# Altium PCB Holder_Accu_Simetric.PcbDoc
Units mm, origin at the board's own origin, x right, y up, seen from the top; angles counter-clockwise.
Board outline 356.65 x 138 mm, 2 copper layers (Top Layer, Bottom Layer); 20 components, 16 nets, 103 pads, 28 vias.
Unrouted connection lines stored in the file: 16.
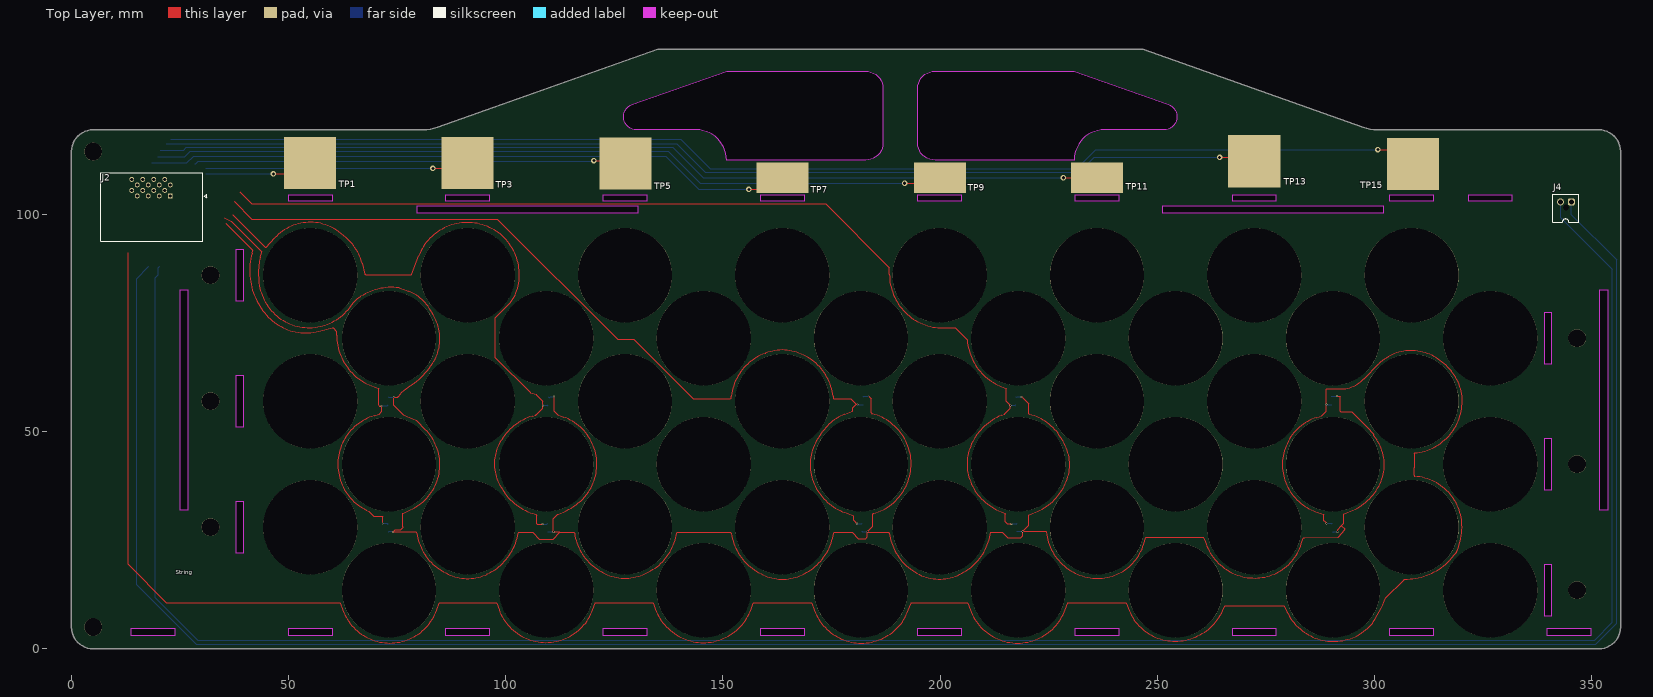
[diagram p0: Top Layer view]
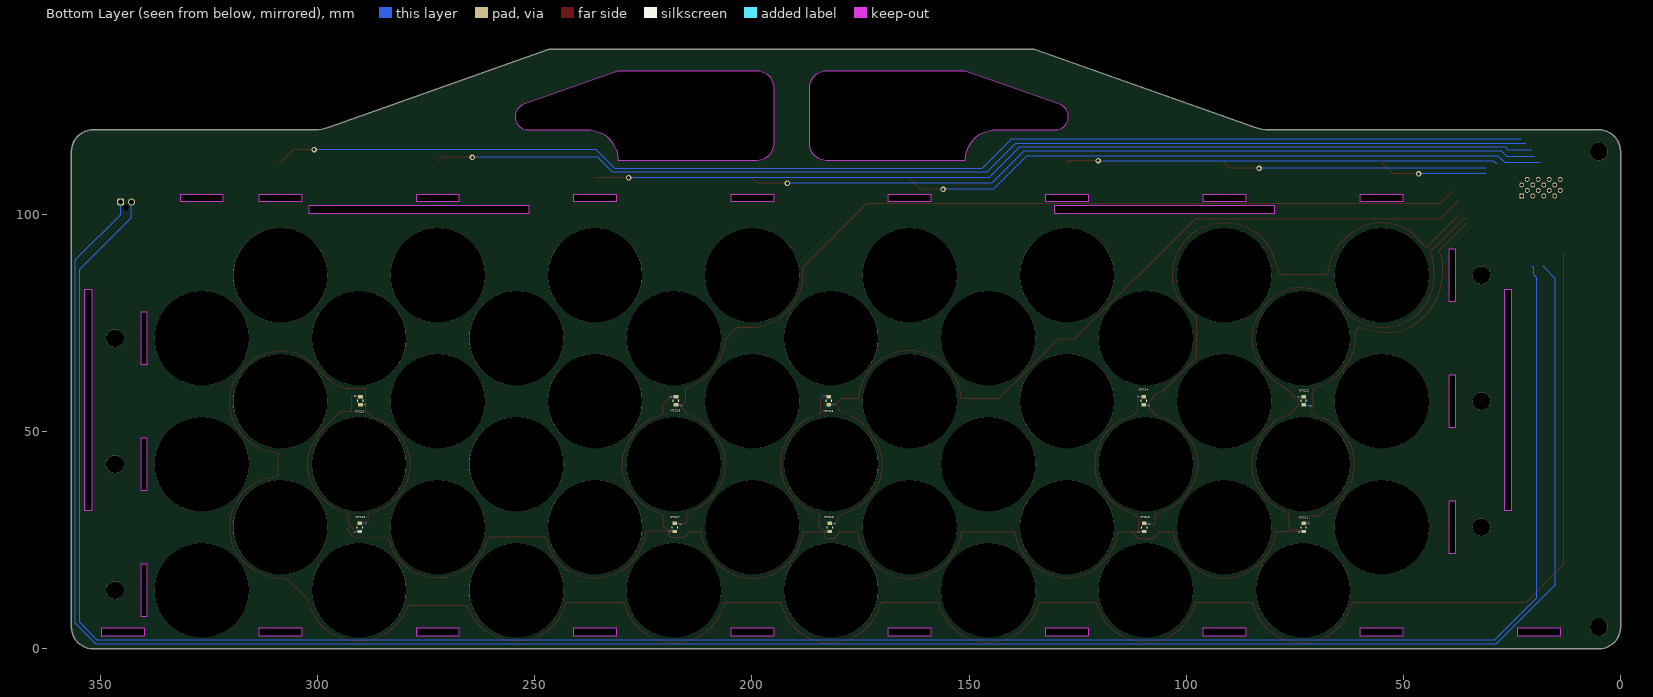
[diagram p1: Bottom Layer view, seen from below]
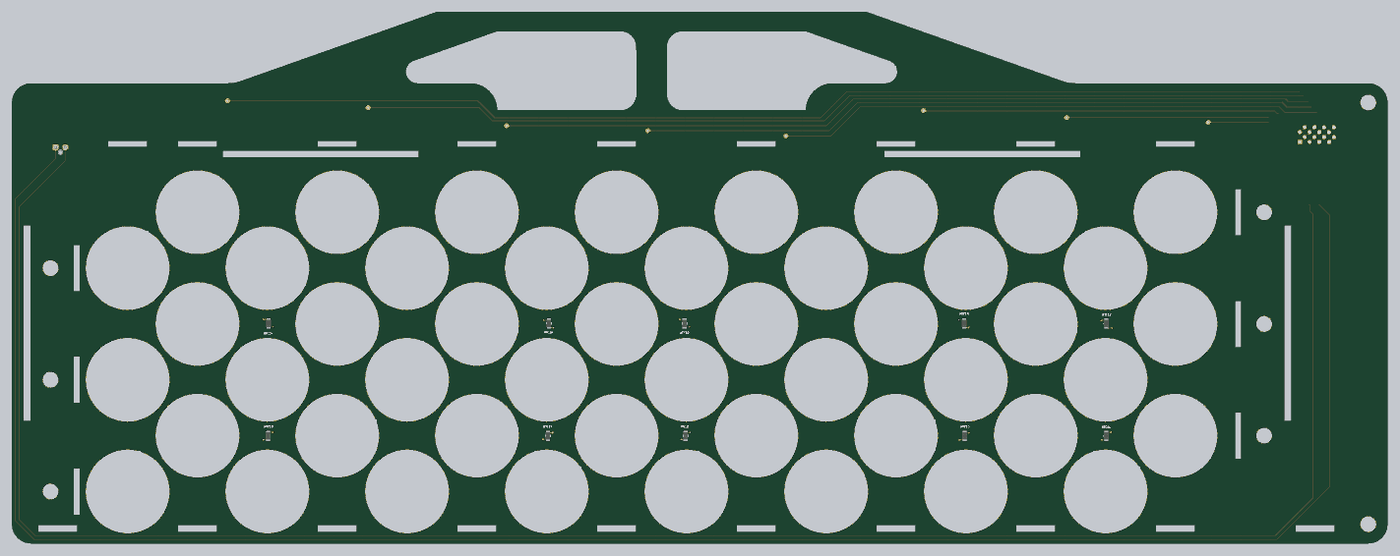
[diagram p2: 3D render of the assembled board from below, using the file's embedded part models]

## Layer stack, top to bottom
Top Solder: solder mask 0.0102, Solder Resist, Dk 3.5
Top Layer: signal copper 0.0356
Dielectric 1: dielectric 0.32, FR-4, Dk 4.8
Bottom Layer: signal copper 0.0356
Bottom Solder: solder mask 0.0102, Solder Resist, Dk 3.5

## Board outline
134.975,138 84.308,120.072 83.495,119.823 82.665,119.644 81.822,119.536 80.972,119.5 4.998,119.5 4.346,119.457 3.704,119.329 3.085,119.119 2.498,118.83 1.954,118.466 1.463,118.035 1.031,117.543 0.668,117 0.379,116.413 0.168,115.794 0.041,115.152 -0.002,114.5 -0.002,5 0.041,4.347 0.168,3.705 0.379,3.086 0.668,2.5 1.031,1.956 1.463,1.464 1.954,1.033 2.498,0.669 3.085,0.38 3.704,0.17 4.346,0.042 4.998,0 351.649,0 352.301,0.042 352.943,0.17 353.562,0.38 354.149,0.669 354.692,1.033 355.184,1.464 355.615,1.956 355.979,2.5 356.268,3.086 356.478,3.705 356.606,4.347 356.649,5 356.649,114.5 356.606,115.152 356.478,115.794 356.268,116.413 355.979,117 355.615,117.543 355.184,118.035 354.692,118.466 354.149,118.83 353.562,119.119 352.943,119.329 352.301,119.457 351.649,119.5 300.674,119.5 299.825,119.536 298.982,119.644 298.151,119.823 297.339,120.072 246.672,138
cut-out: 49.998,4.75 59.998,4.75 59.998,3 49.998,3
cut-out: 303.538,3 303.538,4.75 313.538,4.75 313.538,3
cut-out: 340.649,7.5 339.149,7.5 339.149,19.5 340.649,19.5
cut-out: 39.498,22 37.998,22 37.998,34 39.498,34
cut-out: 340.649,36.5 339.149,36.5 339.149,48.5 340.649,48.5
cut-out: 39.498,51 37.998,51 37.998,63 39.498,63
cut-out: 339.758,4.75 349.758,4.75 349.758,3 339.758,3
cut-out: 267.318,4.75 277.318,4.75 277.318,3 267.318,3
cut-out: 194.878,4.75 204.878,4.75 204.878,3 194.878,3
cut-out: 122.438,4.75 132.438,4.75 132.438,3 122.438,3
cut-out: 24.998,31.875 24.998,82.625 26.748,82.625 26.748,31.875
cut-out: 302.024,102 302.024,100.25 251.274,100.25 251.274,102
cut-out: 79.623,102 130.373,102 130.373,100.25 79.623,100.25
cut-out: 351.899,82.625 353.649,82.625 353.649,31.875 351.899,31.875
cut-out: 49.998,104.5 59.998,104.5 59.998,103 49.998,103
cut-out: 86.218,104.5 96.218,104.5 96.218,103 86.218,103
cut-out: 122.438,104.5 132.438,104.5 132.438,103 122.438,103
cut-out: 158.658,104.5 168.658,104.5 168.658,103 158.658,103
cut-out: 231.098,104.5 241.098,104.5 241.098,103 231.098,103
cut-out: 267.318,104.5 277.318,104.5 277.318,103 267.318,103
cut-out: 303.538,104.5 313.538,104.5 313.538,103 303.538,103
cut-out: 339.149,77.5 340.649,77.5 340.649,65.5 339.149,65.5
cut-out: 37.998,92 39.498,92 39.498,80 37.998,80
cut-out: 241.098,4.75 241.098,3 231.098,3 231.098,4.75
cut-out: 168.658,4.75 168.658,3 158.658,3 158.658,4.75
cut-out: 96.218,4.75 96.218,3 86.218,3 86.218,4.75
cut-out: 23.778,4.75 23.778,3 13.778,3 13.778,4.75
cut-out: 321.649,104.5 331.649,104.5 331.649,103 321.649,103
cut-out: 194.878,104.5 204.878,104.5 204.878,103 194.878,103
cut-out: 186.823,129 186.823,116.5 186.774,115.874 186.628,115.263 186.387,114.684 186.059,114.148 185.652,113.671 185.175,113.263 184.639,112.935 184.059,112.695 183.449,112.549 182.823,112.5 150.823,112.5 150.779,113.283 150.648,114.057 150.431,114.811 150.13,115.537 149.75,116.224 149.296,116.864 148.773,117.449 148.188,117.972 147.548,118.427 146.861,118.806 146.135,119.107 145.381,119.324 144.607,119.455 143.823,119.5 130.142,119.5 129.621,119.545 129.115,119.68 128.642,119.901 128.213,120.201 127.843,120.571 127.543,121 127.322,121.473 127.187,121.979 127.142,122.5 127.188,123.024 127.325,123.533 127.549,124.01 127.853,124.44 128.228,124.81 128.662,125.109 129.141,125.328 150.823,133 182.823,133 183.449,132.95 184.059,132.804 184.639,132.564 185.175,132.236 185.652,131.828 186.059,131.351 186.387,130.815 186.628,130.236 186.774,129.625
cut-out: 230.823,112.5 198.823,112.5 198.198,112.549 197.587,112.695 197.007,112.935 196.472,113.263 195.995,113.671 195.587,114.148 195.259,114.684 195.019,115.263 194.873,115.874 194.823,116.5 194.823,129 194.873,129.625 195.019,130.236 195.259,130.815 195.587,131.351 195.995,131.828 196.472,132.236 197.007,132.564 197.587,132.804 198.198,132.95 198.823,133 230.823,133 252.506,125.328 252.983,125.11 253.415,124.813 253.789,124.445 254.093,124.017 254.318,123.543 254.457,123.037 254.505,122.515 254.462,121.992 254.328,121.485 254.108,121.008 253.809,120.578 253.439,120.206 253.01,119.904 252.534,119.682 252.028,119.545 251.505,119.5 237.823,119.5 237.04,119.455 236.266,119.324 235.511,119.107 234.786,118.806 234.099,118.427 233.459,117.972 232.874,117.449 232.351,116.864 231.896,116.224 231.517,115.537 231.216,114.811 230.999,114.057 230.867,113.283

## Design rules (kind name [scope] priority, off if disabled: settings)
Clearance [All] p1: gap=0.2 ignorepadtopadclearanceinfootprint=FALSE
DiffPairsRouting [All] p1: maxlimit=0.2 minlimit=0.2 mostfreqgap=0.2 toplayer_minwidth=0.2 toplayer_maxwidth=0.2 toplayer_prefwidth=0.2 bottomlayer_minwidth=0.2 bottomlayer_maxwidth=0.2 bottomlayer_prefwidth=0.2 maxuncoupledlength=12.7
PolygonConnect [All] p1: connectstyle=Relief reliefconductorwidth=0.254 reliefentries=4 polygonreliefangle="90 Angle" airgapwidth=0.254
RoutingVias [All] p1: holewidth=0.711 width=1.27 viastyle="Through Hole" minholewidth=0.711 minwidth=1.27 maxholewidth=0.711 maxwidth=1.27
SolderMaskExpansion [All] p1: expansion=0.102 istentingtop=FALSE
SupplyNets "Schematic Supply Nets" [InNet('GND')] p1: voltage=0.000
UnRoutedNet [All] p1: checkbadconnections=TRUE
Width [All] p1: maxlimit=0.2 minlimit=0.2 preferedwidth=0.2
28 further rules are at their usual default settings.

## Components (designator, comment, footprint, x,y, rotation, side; value= is the part's Value field where it differs from the comment)
J2 "459850121" MOLEX_459850121 22.766,104.267 r0 top
J4 "J_Nanofit_1x2_V" J_NanoFit_1X2_V 345.326,102.89 r0 top
NTC11 "NTC_0805" NTC_0805 72.931,27.94 r270 bottom
NTC12 "NTC_0805" NTC_0805 72.931,57.15 r90 bottom
NTC13 "NTC_0805" NTC_0805 109.634,27.94 r270 bottom
NTC14 "NTC_0805" NTC_0805 109.761,57.15 r90 bottom
NTC15 "NTC_0805" NTC_0805 182.024,27.94 r270 bottom
NTC16 "NTC_0805" NTC_0805 182.278,57.15 r90 bottom
NTC17 "NTC_0805" NTC_0805 217.711,27.94 r270 bottom
NTC18 "NTC_0805" NTC_0805 217.457,57.15 r90 bottom
NTC19 "NTC_0805" NTC_0805 290.228,27.94 r270 bottom
NTC20 "NTC_0805" NTC_0805 290.101,57.15 r90 bottom
TP1 "Test Point" TESTPOINT_WIDE#1 54.897,111.887 r0 top
TP3 "Test Point" TESTPOINT_WIDE#1 91.219,111.887 r0 top
TP5 "Test Point" TESTPOINT_WIDE#1 127.541,111.76 r0 top
TP7 "Test Point" TESTPOINT_WIDE#2 163.736,108.458 r0 top
TP9 "Test Point" TESTPOINT_WIDE#2 199.931,108.458 r0 top
TP11 "Test Point" TESTPOINT_WIDE#2 236.126,108.458 r0 top
TP13 "Test Point" TESTPOINT_WIDE#1 272.321,112.268 r0 top
TP15 "Test Point" TESTPOINT_WIDE#1 308.897,111.633 r0 top

## Footprints (in the part's own frame and the unit in brackets; to place one, negate y for a bottom-side part, rotate by r counter-clockwise, add the part's x,y. Pads: shape width x height; smd on the part's side, far side on the other; paste and mask are expansions set on the pad)
J_NanoFit_1X2_V [mm]
  rrect50% 1.6x1.6 hole 1.2: 1(0,0)
  round 1.6 hole 1.2: 2(-2.5,0)
  round 0 hole 1.3: 3(-1.25,-1.29)
  Bottom Layer lines w1: -2.827,-0.165 -2.777,-0.115 -2.5,-0.115 -2.474,-0.115 -2.424,-0.165
  silkscreen extent -4.3,-4.7 1.73,1.81, body extent -4.22,-4.59 1.72,1.75, height 10.58
MOLEX_459850121 [mm]
  rect 1.11x1.11 / inner round 1.11 / far side rect 1.11x1.11 hole 0.76 mask+0.076: 1(0,0)
  round 1.11 hole 0.76 mask+0.076: 2(-1.27,1.27) 3(-2.54,0) 4(-3.81,1.27) 5(-5.08,0) 6(-6.35,1.27) 7(-7.62,0) 8(-8.89,1.27) 9(0,2.54) 10(-1.27,3.81) 11(-2.54,2.54) 12(-3.81,3.81) 13(-5.08,2.54) 14(-6.35,3.81) 15(-7.62,2.54) 16(-8.89,3.81)
  silkscreen extent -15.99,-10.4 8.38,5.38, body extent -11.94,-11.32 3.08,4.97, height 7.49
NTC_0805 [mm]
  rect 0.8x1.05 smd: 1(-0.925,0) 2(0.925,0)
  silkscreen extent -0.21,-0.63 0.21,0.63, body extent -1,-0.6 1,0.6, height 1.3
TESTPOINT_WIDE#1 [mm]
  rect 12x12 smd paste-2539.97: 1(0,0)
TESTPOINT_WIDE#2 [mm]
  rect 12x7 smd paste-2539.97: 1(0,0)

## Part data
J2: Package=None, Availability=Unavailable, MP=459850121, Price=None
J4: "Nano-Fit Vertical Header, Through Hole, 2.50mm Pitch, Single Row, 2 Circuits, with Kinked Pins, Tin (Sn) Plating,...", Manufacturer=Molex, Manufacturer part number=1053092202, Supplier Part Number 1=538-105309-2202, Pricing 1="1=1,09, 10=0,839, 50=0,839, 100=0,686, 1000=0,571, 10000=0,507 (USD)", RoHS=No, Stock 1=6299, Supplier 1=Mouser
NTC11 NTC12 NTC13 NTC14 NTC15 NTC16 NTC17 NTC18 NTC19 NTC20: "NTC Thermistor 10k 0805 (2012 Metric)", Package="0805 TDK", Check_prices=https://www.snapeda.com/parts/NTCG203NH103JTDS/TDK/view-part/?ref=eda, MF="TDK Corporation", MP=NTCG203NH103JTDS, SnapEDA_Link=https://www.snapeda.com/parts/NTCG203NH103JTDS/TDK/view-part/?ref=snap
TP1 TP3 TP5 TP7 TP9 TP11 TP13 TP15: library part TestPoint_Wide, "TestPoint 5x5mm"

## Free pads (board coordinates)
  round 4.1 hole 4.1: 1(31.998,28) 1(31.998,57) 1(31.998,86) 1(346.649,13.5) 1(346.649,42.5) 1(346.649,71.5) 3(4.998,114.499) 4(5,5)
  round 21.7 hole 21.7: 1(54.998,28) 1(54.998,57) 1(54.998,86) 1(73.109,13.5) 1(73.109,42.5) 1(73.109,71.5) 1(91.218,28) 1(91.218,57) 1(91.218,86) 1(109.329,13.5) 1(109.329,42.5) 1(109.329,71.5) 1(127.438,28) 1(127.438,57) 1(127.438,86) 1(145.549,13.5) 1(145.549,42.5) 1(145.549,71.5) 1(163.658,28) 1(163.658,57) 1(163.658,86) 1(181.769,13.5) 1(181.769,42.5) 1(181.769,71.5) 1(199.878,28) 1(199.878,57) 1(199.878,86) 1(217.989,13.5) 1(217.989,42.5) 1(217.989,71.5) 1(236.098,28) 1(236.098,57) 1(236.098,86) 1(254.209,13.5) 1(254.209,42.5) 1(254.209,71.5) 1(272.318,28) 1(272.318,57) 1(272.318,86) 1(290.429,13.5) 1(290.429,42.5) 1(290.429,71.5) 1(308.538,28) 1(308.538,57) 1(308.538,86) 1(326.649,13.5) 1(326.649,42.5) 1(326.649,71.5)

## Via types
v1: diameter 0.45, hole 0.3, Top Layer to Bottom Layer, 18 vias
v2: diameter 1.27, hole 0.711, Top Layer to Bottom Layer, 8 vias
v3: diameter 0.45, hole 0.3, Top Layer to Bottom Layer, tented top, 2 vias

## Nets (pads, with @x,y where several pads share a name; then routed paths per layer and width w, separated by ;. In a path a pad name is that pad's centre, name@x,y a point inside that pad or via, vN(x,y) a via of type N, cw(c..) or ccw(c..) an arc to the next point about the centre after c; other vN are vias at no path point)
GND: J2.16 NTC11.2 NTC12.2 NTC13.2 NTC14.2 NTC15.2 NTC16.2 NTC17.2 NTC18.2 NTC19.2 NTC20.2 | length 603.1
  Top Layer w0.2: 35.174,99.225 36.765,98.478 43.786,91.458 43.798,91.445 43.798,91.235 43.493,90.125 ccw(c54.277,87.156) 43.219,88.839 ccw(c58.289,86.546) 43.088,85.41 ccw(c54.741,85.599) 64.041,78.576 64.538,79.233 64.547,79.246 64.549,79.248 65.026,79.853 65.8,80.627 65.819,80.639 66.612,81.142 cw(c73.781,69.851) 75.444,83.122 cw(c75.412,82.871) 75.499,83.109 75.501,83.108 77.615,82.317 77.63,82.311 cw(c74.279,73.396) 82.108,78.82 cw(c58.193,62.813) 83.652,76.229 cw(c74.491,71.4) 83.167,65.746 83.163,65.741 cw(c67.616,75.878) 80.479,62.498 cw(c68.729,74.72) 78.016,60.535 76.573,59.591 76.095,59.024 cw(c55.003,76.795) 75.352,58.178 cw(c71.575,61.633) 75.172,57.99 cw(c75.033,58.134) 75.165,57.984 75.108,57.934 75.033,57.934 v3(74.198,57.934) 74.198,56.066 76.307,53.956 76.341,53.922 79.408,52.578 81.492,50.493 cw(c73.436,42.437) 78.01,32.003 76.341,31.271 76.233,31.163 76.233,28.067 76.233,27.856 75.809,27.433 74.529,27.433 74.036,26.941 v1(74.036,26.919) 74.041,26.914 79.261,26.914 79.379,26.797 79.528,26.648 ccw(c91.361,28.243) 86.135,17.507 86.717,17.224 ccw(c91.214,26.459) 95.715,17.225 95.748,17.242 ccw(c90.475,28.621) 102.861,26.648 103.01,26.797 106.159,26.797 107.683,25.273 110.934,25.273 112.458,26.797 ; v1(111.11,58.047) 111.11,54.657 111.908,53.86 113.291,53.367 113.301,53.364 cw(c109.469,42.513) 119.054,36.144 119.049,36.138 118.169,34.983 cw(c106.91,45.521) 118.16,34.973 cw(c106.91,45.521) 112.035,30.976 111.994,30.935 110.976,29.917 v1(110.976,26.934) 112.32,26.934 112.458,26.797 ; v1(183.565,58.156) 184.183,57.538 184.183,54.303 184.202,54.257 ccw(c184.437,54.353) 184.372,54.108 cw(c181.418,42.571) 193.327,42.672 cw(c181.496,42.572) 184.623,31.161 ccw(c184.691,30.917) 184.453,31.007 184.437,30.963 184.437,30.917 184.437,28.231 v1(183.217,27.012) ; v1(218.763,58.004) 220.378,56.39 220.378,54.183 220.397,54.136 ccw(c220.632,54.234) 220.568,53.988 cw(c217.7,42.591) 227.476,49.114 ; 227.477,49.113 228.034,48.27 cw(c219.133,42.387) 228.034,36.504 227.816,36.174 cw(c217.346,43.093) 221.332,31.193 220.526,30.923 220.378,30.774 220.378,30.723 220.378,28.407 v1(218.997,27.026) ; v1(291.377,58.208) 291.973,58.208 292.09,58.091 292.09,54.711 292.207,54.593 294.721,54.593 298.232,51.082 299.859,49.456 299.859,49.112 300.493,48.166 cw(c291.87,42.386) 300.494,36.606 300.364,36.413 cw(c289.735,43.535) 293.872,31.428 293.043,31.145 292.895,30.996 292.895,30.946 292.895,28.871 292.385,28.361 ; v1(291.481,26.945) 291.493,26.957 291.493,27.47 292.385,28.361 ; 112.458,26.797 115.608,26.797 115.682,26.797 115.83,26.648 ccw(c127.617,28.236) 122.413,17.542 122.888,17.311 ccw(c127.441,26.667) 131.995,17.311 132.883,17.743 ccw(c127.791,28.205) 139.322,26.648 139.471,26.797 151.649,26.797 151.72,26.797 151.869,26.648 152.015,25.943 ccw(c164.198,28.462) 158.757,17.274 159.199,17.059 ccw(c163.689,26.286) 168.717,17.34 ccw(c163.397,28.274) 175.447,26.648 175.596,26.797 179.767,26.797 181.164,25.4 182.866,25.4 183.217,25.751 v1(183.217,27.012) ; v1(183.217,27.012) 183.285,27.012 183.5,26.797 188.06,26.797 188.134,26.797 188.223,26.708 188.283,26.648 ccw(c200.619,28.31) 195.173,17.117 ccw(c199.821,26.685) 204.476,17.12 ccw(c198.698,28.996) 209.456,21.336 ccw(c199.352,28.529) 211.541,26.234 211.647,26.797 214.273,26.797 215.543,25.527 218.513,25.527 218.997,26.01 v1(218.997,27.026) ; v1(218.997,27.026) 219.021,27.051 224.185,27.051 224.265,27.051 224.414,26.902 224.51,26.303 ccw(c236.344,28.211) 235.118,16.287 ccw(c236.254,27.338) 246.861,24.037 247.327,25.535 247.371,25.579 247.446,25.654 260.544,25.654 260.596,25.654 260.745,25.505 261.016,24.66 ccw(c272.472,28.333) 272.505,16.302 ccw(c272.475,27.523) 283.179,24.158 283.592,25.472 283.636,25.516 283.71,25.59 283.936,25.59 291.616,25.747 291.696,25.748 291.756,25.808 293.205,27.38 293.205,27.541 293.146,27.6 292.385,28.361
  Bottom Layer w0.2: NTC11.2@73.022,26.924 73.115,27.017 73.87,27.017 73.968,26.919 v1(74.036,26.919) ; NTC13.2@109.725,26.924 109.735,26.934 v1(110.976,26.934) ; NTC14.2@110.034,57.802 110.034,57.895 110.186,58.047 v1(111.11,58.047) ; NTC15.2@182.06,27.051 182.098,27.012 v1(183.217,27.012) ; NTC16.2@182.369,58.166 182.378,58.156 v1(183.565,58.156) ; NTC18.2@217.62,57.912 217.712,58.004 v1(218.763,58.004) ; NTC17.2@217.747,27.051 217.771,27.026 v1(218.997,27.026) ; NTC20.2@290.192,58.166 290.234,58.208 v1(291.377,58.208) ; NTC19.2@290.446,26.797 290.594,26.945 v1(291.481,26.945)
  Bottom Layer w0.254: NTC11.2 NTC11.2@73.022,26.924 ; NTC12.2 73.071,57.934 v3(74.198,57.934) ; NTC13.2 NTC13.2@109.725,26.924 ; NTC14.2 NTC14.2@110.034,57.802 ; NTC15.2 NTC15.2@182.06,27.051 ; NTC16.2 NTC16.2@182.369,58.166 ; NTC18.2 NTC18.2@217.62,57.912 ; NTC17.2 NTC17.2@217.747,27.051 ; NTC20.2 NTC20.2@290.192,58.166 ; NTC19.2 NTC19.2@290.446,26.797
IM: J2.15 J4.2 | length 519.5
  Bottom Layer w0.2: 20.333,88.031 20.033,87.731 20.033,86.167 19.337,85.471 19.337,11.811 29.116,2.032 350.68,2.032 354.744,6.096 354.744,87.376 342.826,99.294 342.826,102.775 J4.2
IP: J2.14 J4.1 | length 524.3
  Bottom Layer w0.2: 17.833,88.031 17.718,87.916 15.019,85.217 15.019,14.732 28.735,1.016 350.934,1.016 355.76,5.842 355.76,89.535 345.326,99.969 J4.1
NetJ2_1: J2.1 TP1.1 | length 25.1
  Top Layer w0.254: v2(46.515,109.347) 52.357,109.347 TP1.1
  Bottom Layer w0.2: 30.894,109.347 v2(46.515,109.347)
NetJ2_2: J2.2 TP3.1 | length 60.9
  Top Layer w0.2: v2(83.218,110.617) TP3.1@89.949,110.617
  Top Layer w0.254: TP3.1@89.949,110.617 TP3.1
  Bottom Layer w0.2: 30.894,110.617 v2(83.218,110.617)
NetJ2_3: J2.3 TP5.1 | length 99.8
  Top Layer w0.2: v2(120.302,112.395) TP5.1@126.906,112.395
  Top Layer w0.254: TP5.1@126.906,112.395 TP5.1
  Bottom Layer w0.2: 28.354,111.633 28.599,111.633 29.234,112.268 120.175,112.268 v2(120.302,112.395)
NetJ2_4: J2.4 TP7.1 | length 150.2
  Top Layer w0.2: v2(155.989,105.791) TP7.1@161.069,105.791
  Top Layer w0.254: TP7.1@161.069,105.791 TP7.1
  Bottom Layer w0.2: 18.448,111.887 26.576,111.887 28.1,113.411 136.812,113.411 144.432,105.791 v2(155.989,105.791)
NetJ2_5: J2.5 TP9.1 | length 184.2
  Top Layer w0.2: v2(191.803,107.188) TP9.1@198.661,107.188
  Top Layer w0.254: TP9.1@198.661,107.188 TP9.1
  Bottom Layer w0.2: 27.338,114.554 137.447,114.554 144.813,107.188 v2(191.803,107.188)
  Bottom Layer w0.254: 19.845,113.284 26.068,113.284 27.338,114.554
NetJ2_6: J2.6 TP11.1 | length 218.8
  Top Layer w0.2: v2(228.379,108.458) TP11.1
  Bottom Layer w0.2: 20.48,114.808 25.814,114.808 26.449,115.443 138.463,115.443 145.448,108.458 v2(228.379,108.458)
NetJ2_7: J2.7 TP13.1 | length 255.1
  Top Layer w0.2: v2(264.32,113.157) TP13.1@271.432,113.157
  Top Layer w0.254: TP13.1@271.432,113.157 TP13.1
  Bottom Layer w0.2: 21.877,116.332 139.33,116.332 145.934,109.728 232.062,109.728
  Bottom Layer w0.254: 21.815,116.27 21.877,116.332 ; 232.062,109.728 235.491,113.157 v2(264.32,113.157)
NetJ2_8: J2.8 TP15.1 | length 292.1
  Top Layer w0.2: v2(300.769,114.935) TP15.1@305.595,114.935
  Top Layer w0.254: TP15.1@305.595,114.935 TP15.1
  Bottom Layer w0.2: 22.893,117.348 140.241,117.348 147.099,110.49 231.427,110.49
  Bottom Layer w0.254: 231.427,110.49 235.872,114.935 v2(300.769,114.935)
NetJ2_9: J2.9 NTC11.1 NTC12.1 | length 105.2
  Top Layer w0.2: 35.539,97.97 41.726,91.783 41.726,91.6 41.591,91.116 ccw(c56.244,87.01) 45.349,76.385 ccw(c53.979,84.8) 56.917,73.11 60.039,73.895 60.249,73.895 60.258,73.886 61.013,73.131 61.067,73.077 61.067,72.24 ccw(c73.577,72.235) 69.682,60.346 70.614,60.041 70.657,59.998 70.731,59.924 70.731,56.046 70.871,55.907 v3(71.433,55.907) 71.481,55.859 71.481,54.679 70.814,54.013 70.778,53.976 70.729,53.962 69.723,53.668 ccw(c72.998,42.46) 68.457,31.702 69.653,30.507 71.557,30.507 71.674,30.39 71.674,29.596 v1(71.674,28.887)
  Bottom Layer w0.2: v1(71.674,28.887) 72.582,28.887 NTC11.1@72.768,28.702
  Bottom Layer w0.254: v3(71.433,55.907) 71.486,55.907 71.531,55.952 72.658,55.952 NTC12.1 ; NTC11.1@72.768,28.702 NTC11.1
NetJ2_10: J2.10 NTC13.1 NTC14.1 | length 168.4
  Top Layer w0.2: 37.18,99.885 44.567,92.498 44.626,92.439 44.791,92.439 44.853,92.501 46.822,94.625 cw(c54.987,87.055) 61.524,96.068 cw(c49.832,79.951) 63.827,94.115 cw(c55.601,85.79) 66.911,88.8 ; 66.911,88.8 67.577,86.294 67.595,86.228 67.718,86.106 78.195,86.106 78.308,86.218 79.942,90.464 cw(c91.139,86.155) 102.337,81.847 cw(c95.602,84.438) 100.704,79.335 97.569,76.2 97.569,70.92 97.569,67.056 105.598,59.026 105.643,58.981 106.974,58.588 107.019,58.542 108.545,57.016 108.545,55.441 106.98,53.875 106.945,53.84 106.898,53.825 106.143,53.59 ; 106.142,53.59 ccw(c110.021,41.135) 99.039,48.176 98.917,47.986 ccw(c107.344,42.588) 98.92,37.185 99.514,36.259 ccw(c109.822,42.87) 106.157,31.185 106.945,30.938 107.094,30.789 107.094,30.735 107.094,28.845 107.211,28.728 v1(108.47,28.728)
  Bottom Layer w0.2: v1(108.47,28.728) 109.444,28.728 NTC13.1@109.471,28.702 ; v1(108.545,56.07) 109.479,56.07 NTC14.1@109.543,56.007
  Bottom Layer w0.254: NTC13.1@109.471,28.702 NTC13.1 ; NTC14.1@109.543,56.007 NTC14.1
NetJ2_11: J2.11 NTC15.1 NTC16.1 | length 214.8
  Top Layer w0.2: 37.498,102.997 41.562,98.933 98.077,98.933 125.763,71.247 129.446,71.247 143.053,57.639 143.127,57.565 151.62,57.565 151.708,57.565 151.856,57.714 151.915,58.209 cw(c163.791,56.804) 159.733,68.054 159.793,68.075 cw(c163.632,58.397) 167.474,68.075 cw(c163.47,56.804) 175.348,58.209 175.406,57.714 175.555,57.565 175.642,57.565 179.405,57.565 180.684,56.286 ; v1(180.843,28.836) 180.082,29.597 180.082,30.594 177.98,31.397 cw(c182.546,43.343) 172.113,35.947 cw(c181.201,42.388) 172.113,48.829 172.971,50.04 cw(c182.055,43.602) 178.02,53.979 179.786,54.666 179.913,54.793 179.913,55.489 180.697,56.273 180.981,56.273 v1(181.028,56.225)
  Bottom Layer w0.2: v1(180.843,28.836) 181.98,28.836 NTC15.1@181.988,28.829 ; v1(181.028,56.225) NTC16.1
  Bottom Layer w0.254: NTC15.1@181.988,28.829 NTC15.1
NetJ2_12: J2.12 NTC17.1 NTC18.1 | length 243.6
  Top Layer w0.2: 38.768,105.283 41.562,102.489 173.642,102.489 188.338,87.792 188.328,86.237 ccw(c200.624,86.164) 200.698,73.868 203.338,73.884 203.443,73.884 206.151,71.238 206.219,71.17 206.224,71.111 ccw(c219.132,72.199) 209.202,63.881 ccw(c218.259,71.468) 214.226,60.362 215.124,60.036 215.272,59.887 215.272,59.842 215.272,56.978 v1(216.195,56.055) 216.195,55.362 214.924,54.091 214.857,54.047 214.064,53.726 ccw(c218.797,42.021) 208.573,49.429 208.332,49.096 208.331,49.095 ccw(c217.371,42.545) 208.331,35.993 ccw(c218.844,43.611) 214.032,31.553 214.895,31.209 215.044,31.06 215.044,31.019 215.044,29.21 215.47,28.783 v1(216.475,28.783)
  Bottom Layer w0.2: v1(216.195,56.055) 217.19,56.055 NTC18.1@217.239,56.007 ; v1(216.475,28.783) 217.466,28.783 NTC17.1@217.548,28.702
  Bottom Layer w0.254: NTC18.1@217.239,56.007 NTC18.1 ; NTC17.1@217.548,28.702 NTC17.1
NetJ2_13: J2.13 NTC19.1 NTC20.1 | length 575.6
  Top Layer w0.2: 13.114,91.23 13.114,19.431 21.877,10.668 61.79,10.668 61.904,10.553 62.511,8.891 ccw(c73.309,12.833) 84.106,8.888 84.715,10.553 84.754,10.593 84.829,10.668 97.76,10.668 97.874,10.553 98.434,9.02 ccw(c109.242,12.963) 120.047,9.014 120.609,10.553 120.649,10.593 120.723,10.668 133.828,10.668 133.942,10.553 134.457,9.145 ccw(c145.477,13.168) 156.496,9.142 157.012,10.553 157.052,10.593 157.126,10.668 170.323,10.668 170.438,10.553 171.048,8.883 ccw(c181.869,12.844) 192.69,8.885 193.3,10.553 193.339,10.593 193.414,10.668 206.23,10.668 206.344,10.553 206.926,8.962 ccw(c217.844,12.95) 228.761,8.96 229.343,10.553 229.383,10.593 229.457,10.668 242.713,10.668 242.828,10.553 243.272,9.336 ccw(c254.081,13.285) 254.16,1.778 ccw(c254.077,13.914) 265.064,8.759 265.532,9.757 265.681,9.906 279.065,9.906 279.089,9.906 279.238,9.757 279.831,8.569 ccw(c294.213,15.756) 281.084,6.477 ccw(c287.822,11.239) 282.374,5.042 282.431,4.991 ccw(c290.575,13.467) 298.886,5.156 ccw(c294.173,9.869) 299.753,6.223 ccw(c274.623,22.647) 302.586,11.723 302.623,11.76 306.827,15.964 306.901,16.038 ccw(c306.901,30.936) 316.915,19.906 317.213,20.291 cw(c336.644,5.297) 318.821,22.171 ccw(c318.636,22.345) 318.868,22.241 ccw(c305.056,28.344) 320.123,27.359 ccw(c308.52,28.117) 309.274,39.721 309.226,39.756 cw(c309.379,39.959) 309.181,39.8 309.125,39.869 309.125,39.959 309.125,41.686 309.125,44.871 309.125,44.955 309.274,45.104 ccw(c308.189,57.065) 320.2,57.065 320.2,58.107 ccw(c319.946,58.107) 320.198,58.138 ccw(c308.966,56.674) 317.675,63.917 317.614,63.99 ccw(c308.246,56.937) 309.418,68.605 ccw(c308.372,58.198) 300.971,65.588 297.588,62.2 297.577,62.188 cw(c291.604,68.023) 293.358,59.86 289.015,59.86 288.898,59.743 v1(288.898,56.223) 288.898,54.708 287.867,53.678 287.824,53.634 286.668,53.259 ccw(c290.191,42.399) 286.515,31.59 288.224,31.009 288.316,30.918 288.316,29.527 288.375,29.469 v1(288.981,28.862)
  Bottom Layer w0.2: v1@288.898,56.225 NTC20.1 ; v1(288.981,28.862) 290.158,28.862 NTC19.1@290.192,28.829
  Bottom Layer w0.254: v1@288.896,56.225 v1(288.898,56.223) ; NTC19.1@290.192,28.829 NTC19.1
pads on no net: J4.3

## Silkscreen, mask and mechanical layers (free items; w line width, h text height)
Top Overlay:
  text "String" at 23.978,16.83 h1.52

## Text inside footprints (layer, text, board x,y; h text height)
J2: Mechanical 13 "PTH D0.76 +/- 0.05" at 14.257,91.948 h0.5